# Altium PCB ft232h.PcbDoc (part 1 of 2)
Units mil, origin at the board's own origin, x right, y up, seen from the top; angles counter-clockwise.
Board outline 2559.06 x 1181.1 mil, 4 copper layers (Top Layer, L2, L3, Bottom Layer), stack 62.044 mil thick; 101 components, 60 nets, 328 pads, 69 vias.
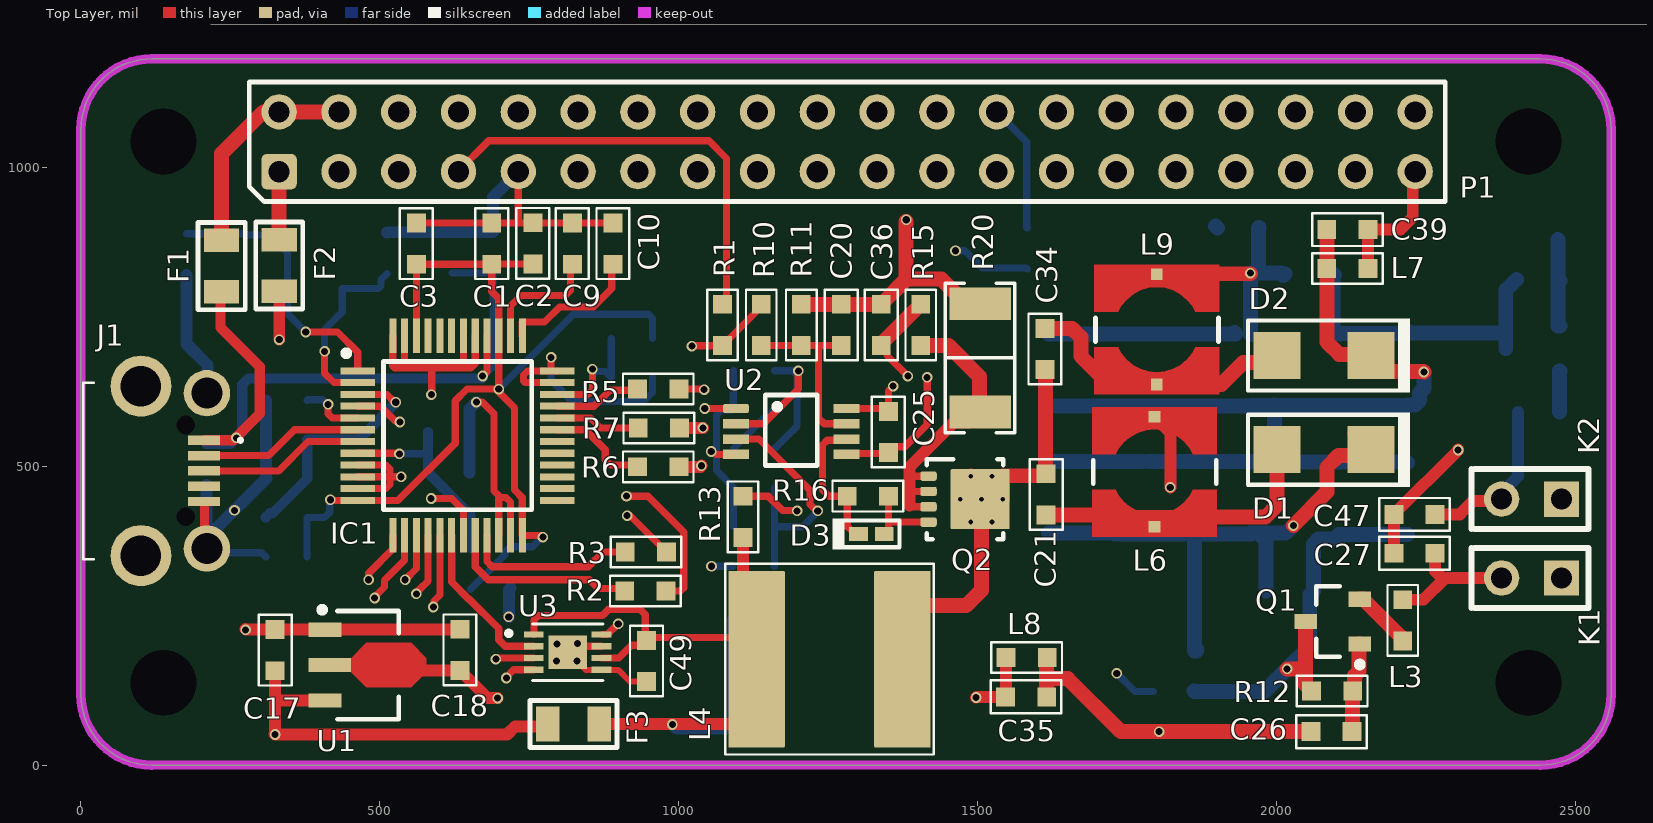
[diagram p0: Top Layer view]
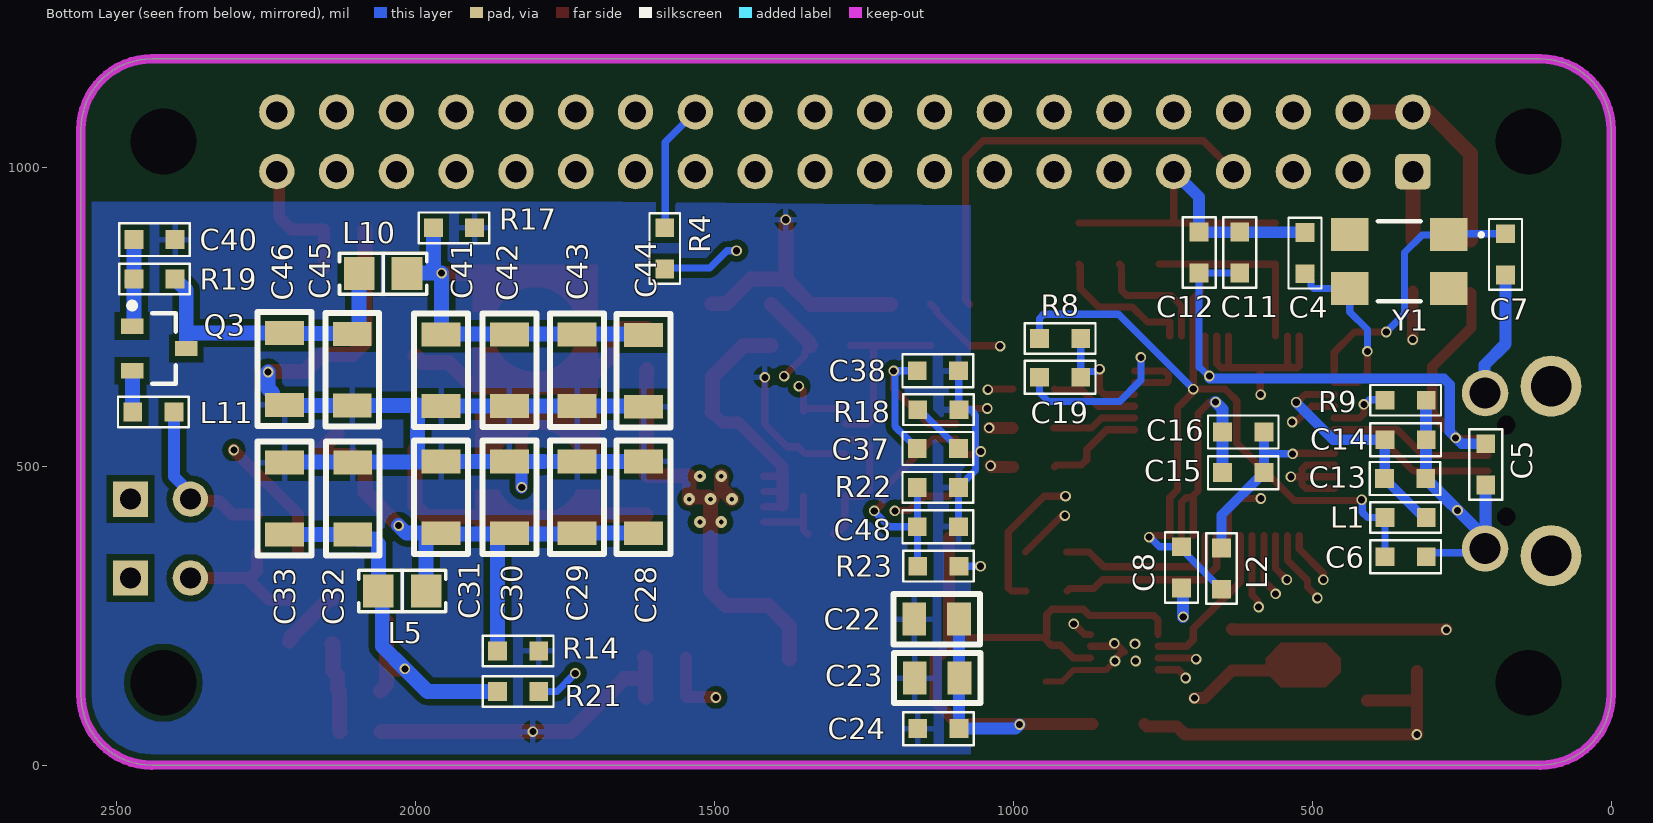
[diagram p1: Bottom Layer view, seen from below]
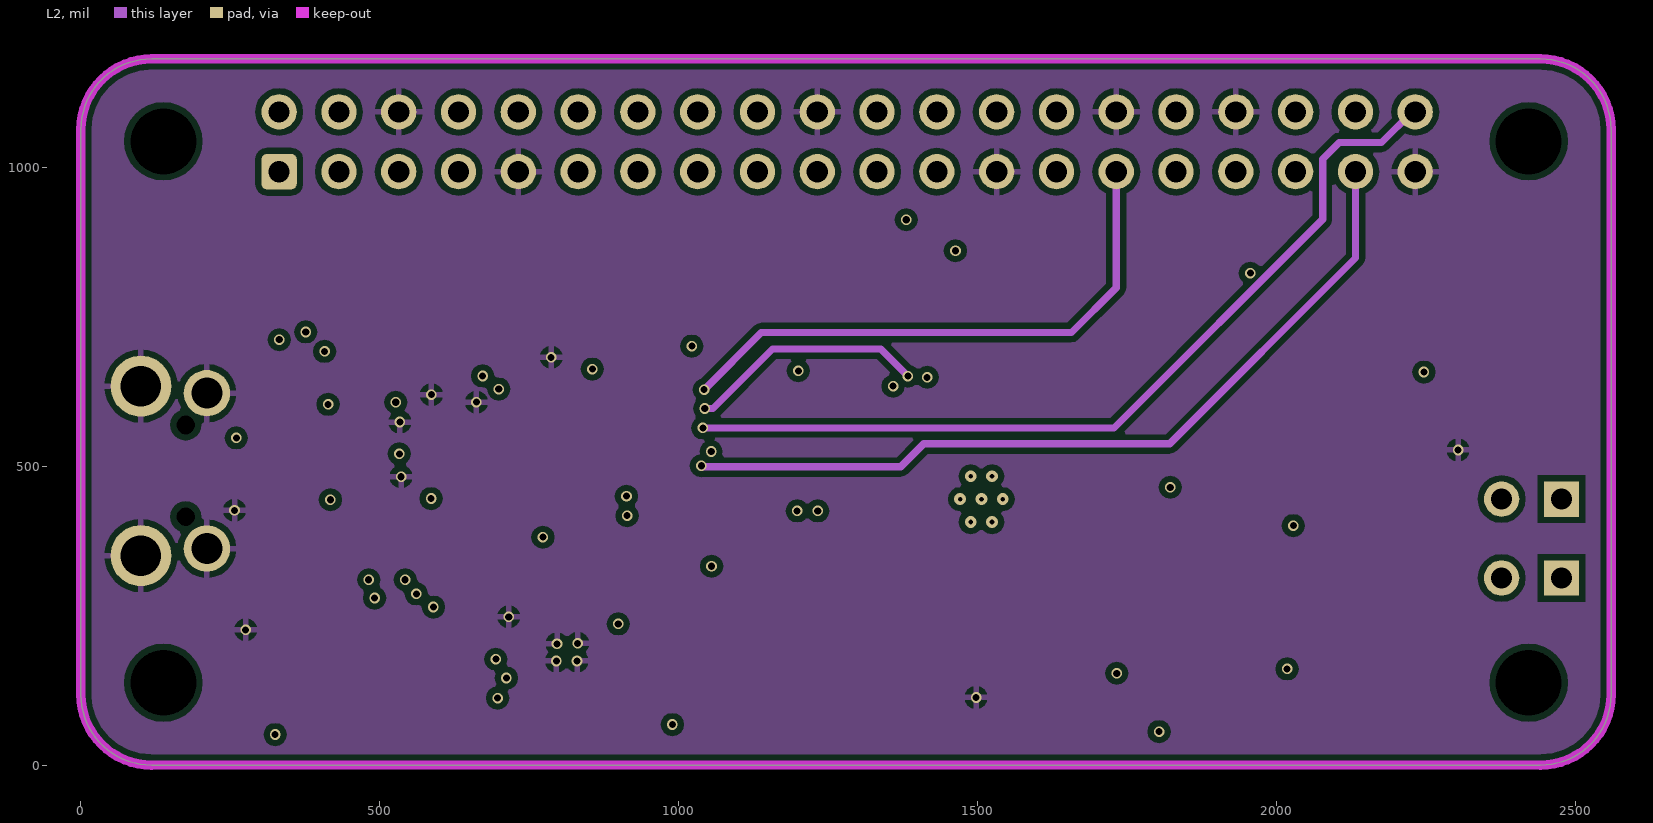
[diagram p2: L2]
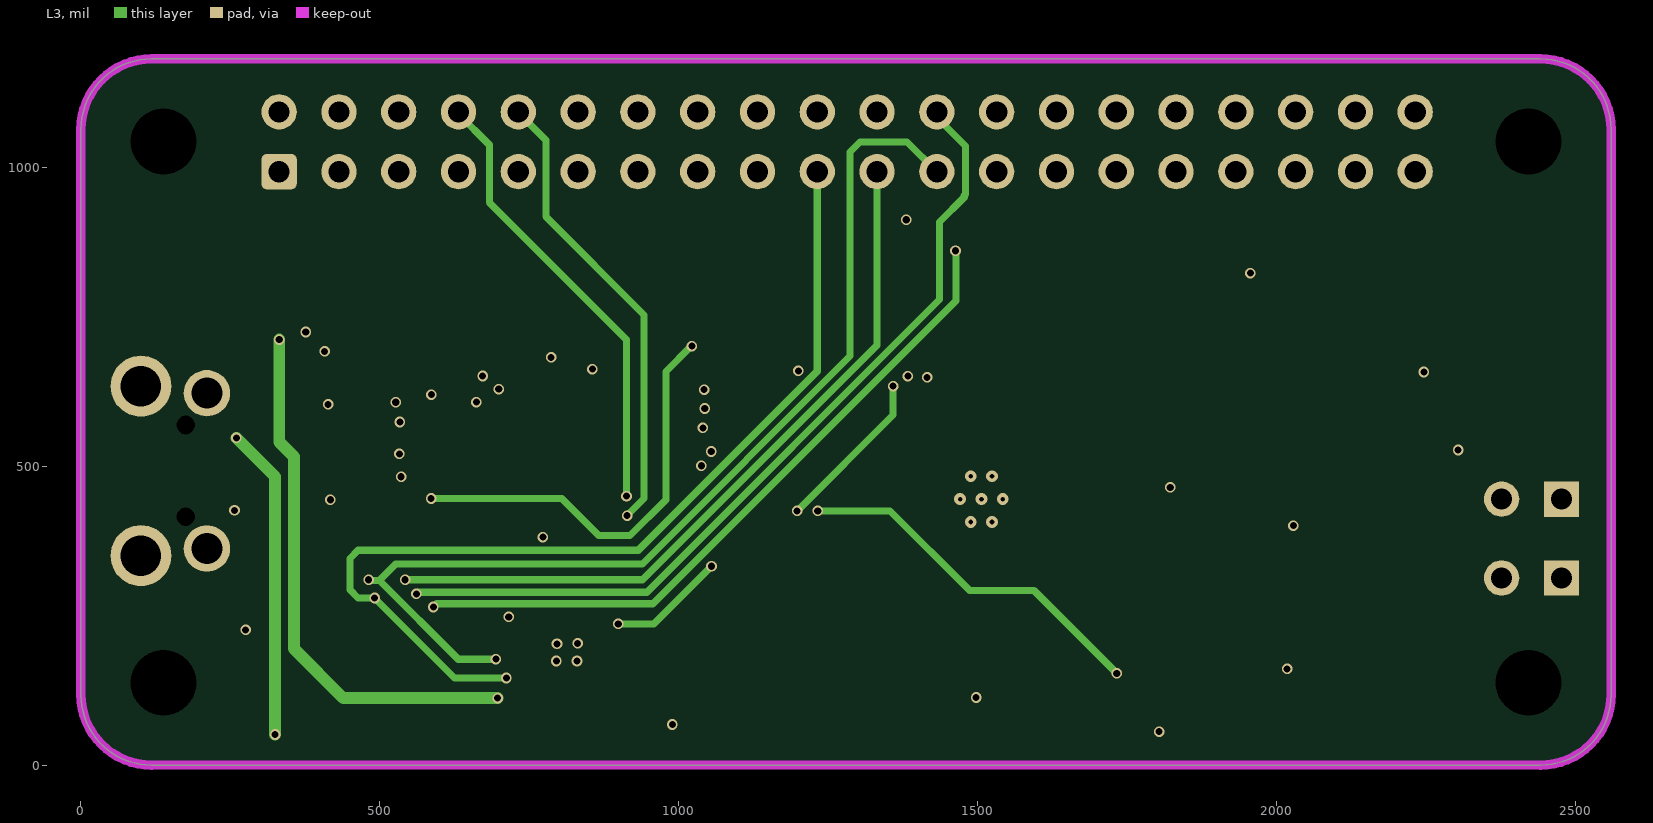
[diagram p3: L3]

## Layer stack, top to bottom
Top Solder: solder mask 0.4, Solder Resist, Dk 3.5
Top Layer: signal copper 1.4
Dielectric 2: prepreg 6, PP-018, Dk 4.3
L2: signal copper 1.378
Dielectric 1: dielectric 44.4882, FR-4, Dk 4.8
L3: signal copper 1.378
Dielectric 3: prepreg 6, PP-018, Dk 4.3
Bottom Layer: signal copper 1.4
Bottom Solder: solder mask 0.4, Solder Resist, Dk 3.5

## Board outline
0,118.11 0,1062.99 cw(c118.11,1062.99) 118.11,1181.1 2440.94,1181.1 cw(c2440.94,1062.99) 2559.06,1062.99 2559.06,118.11 cw(c2440.94,118.11) 2440.94,0 118.11,0 cw(c118.11,118.11)

## Design rules (kind name [scope] priority, off if disabled: settings)
Clearance Clearance_3 [InPolygon] p1: gap=10 ignorepadtopadclearanceinfootprint=FALSE except(0: Arc-Hole Track-Hole SMDPad-Hole THPad-Hole Via-Hole Fill-Hole Poly-Hole Region-Hole Text-Hole)
Clearance [All] p2: gap=7.09 ignorepadtopadclearanceinfootprint=TRUE except(0: Arc-Hole Track-Hole SMDPad-THPad SMDPad-Hole THPad-Hole Via-Hole Fill-Hole Poly-Hole Region-Hole Text-Hole)
ComponentClearance [All] p1: gap=3.94 collisioncheckmode=3 verticalgap=3.94 showdistances=FALSE
HoleSize [All] p1 off: absolutevalues=TRUE maxlimit=100 minlimit=1 maxpercent=80.000 minpercent=20.000
MinimumSolderMaskSliver [All] p1: minsoldermaskwidth=0
PasteMaskExpansion [All] p1: expansion=1.97
PolygonConnect PolygonConnect_1 [All] p1: connectstyle=Relief reliefconductorwidth=10 reliefentries=4 polygonreliefangle="90 Angle" airgapwidth=10
RoutingVias [All] p1: holewidth=13.78 width=21.65 viastyle="Through Hole" minholewidth=11.81 minwidth=17.72 maxholewidth=13.78 maxwidth=21.65
SilkToSilkClearance [All] p1: silktosilkclearance=0
SolderMaskExpansion [All] p1: expansion=4 istentingtop=FALSE
Width [All] p1: maxlimit=120 minlimit=7.09 preferedwidth=7.09
25 further rules are at their usual default settings.

## Components (designator, comment, footprint, x,y, rotation, side; value= is the part's Value field where it differs from the comment)
C1 "cap0603" "SM0603 _3D_cap" 687.01,872.05 r270 top value=2.2
C2 "cap0603" "SM0603 _3D_cap" 755.91,872.63 r270 top value=0.1
C3 "cap0603" "SM0603 _3D_cap" 561.02,872.05 r270 top value=0.1
C4 "cap0603" "SM0603 _3D_cap" 511.81,856.3 r270 bottom value=22
C5 "cap0603" "SM0603 _3D_cap" 209.65,502.95 r270 bottom value=0.1
C6 "cap0603" "SM0603 _3D_cap" 343.5,348.43 r0 bottom value=0.1
C7 "cap0603" "SM0603 _3D_cap" 176.53,854.33 r90 bottom value=22
C8 "cap0603" "SM0603 _3D_cap" 718.5,330.72 r90 bottom value=0.1
C9 "cap0603" "SM0603 _3D_cap" 821.85,872.05 r270 top value=0.1
C10 "cap0603" "SM0603 _3D_cap" 889.76,872.05 r270 top value=0.1
C11 "cap0603" "SM0603 _3D_cap" 621.06,857.28 r270 bottom value=0.1
C12 "cap0603" "SM0603 _3D_cap" 688.98,857.28 r270 bottom value=2.2
C13 "cap0603" "SM0603 _3D_cap" 344.49,479.33 r0 bottom value=0.1
C14 "cap0603" "SM0603 _3D_cap" 343.5,544.3 r0 bottom value=2.2
C15 "cap0603" "SM0603 _3D_cap" 615.16,489.17 r180 bottom value=0.1
C16 "cap0603" "SM0603 _3D_cap" 615.16,557.09 r180 bottom value=2.2
C17 "cap0603" "SM0603 _3D_cap" 324.8,192.19 r270 top value=2.2
C18 "cap0603" "SM0603 _3D_cap" 633.86,192.91 r270 top value=2.2
C19 "cap0603" "SM0603 _3D_cap" 921.26,648.61 r180 bottom value=10n
C20 "cap0603" "SM0603 _3D_cap" 1271.65,736.22 r90 top value=270pf
C21 "cap0603" "SM0603 _3D_cap" 1614.17,452.76 r270 top value=2u2
C22 "cap0805" SM0805 1165.35,244.09 r180 bottom value=47u
C23 "cap0805" SM0805 1164.57,145.67 r180 bottom value=47u
C24 "cap0603" "SM0603 _3D_cap" 1125,61.02 r180 bottom value=0.1
C25 "cap0603" "SM0603 _3D_cap" 1350.39,557.09 r90 top value=4u7
C26 "cap0603" "SM0603 _3D_cap" 2091.54,56.1 r0 top value="1u x100v"
C27 "cap0603" "SM0603 _3D_cap" 2230.31,354.33 r0 top value="0.1 x100v"
C28 "cap1206" SM1206 1618.11,507.87 r270 bottom value="2u2 x 100V"
C29 "cap1206" SM1206 1729.33,507.87 r270 bottom value="2u2 x 100V"
C30 "cap1206" SM1206 1842.52,507.87 r270 bottom value="2u2 x 100V"
C31 "cap1206" SM1206 1956.69,507.87 r270 bottom value="2u2 x 100V"
C32 "cap1206" SM1206 2104.33,505.91 r270 bottom value="2u2 x 100V"
C33 "cap1206" SM1206 2218.5,505.91 r270 bottom value="2u2 x 100V"
C34 "cap0603" "SM0603 _3D_cap" 1612.21,695.86 r90 top value=2u2
C35 "cap0603" "SM0603 _3D_cap" 1580.71,114.17 r180 top value=0.1
C36 "cap0603" "SM0603 _3D_cap" 1338.58,736.22 r90 top value=2n2
C37 "cap0603" "SM0603 _3D_cap" 1125.99,529.52 r180 bottom value=0.1
C38 "cap0603" "SM0603 _3D_cap" 1125.98,659.45 r180 bottom value=0.1
C39 "cap0603" "SM0603 _3D_cap" 2118.11,895.67 r0 top value=0.1
C40 "cap0603" "SM0603 _3D_cap" 2436.02,878.94 r180 bottom value="1u x100v"
C41 "cap1206" SM1206 1956.69,720.39 r270 bottom value="2u2 x 100V"
C42 "cap1206" SM1206 1842.52,720.39 r270 bottom value="2u2 x 100V"
C43 "cap1206" SM1206 1729.33,720.47 r270 bottom value="2u2 x 100V"
C44 "cap1206" SM1206 1618.11,719.41 r270 bottom value="2u2 x 100V"
C45 "cap1206" SM1206 2105.31,721.38 r270 bottom value="2u2 x 100V"
C46 "cap1206" SM1206 2218.5,722.44 r270 bottom value="2u2 x 100V"
C47 "cap0603" "SM0603 _3D_cap" 2230.32,419.29 r180 top value="0.1 x100v"
C48 "cap0603" "SM0603 _3D_cap" 1125.98,398.62 r180 bottom value=100
C49 "cap0603" "SM0603 _3D_cap" 945.87,174.21 r270 top value=0.1
D1 "STPS1150A" SMA 2078.74,527.56 r180 top value=150V
D2 "STPS1150A" SMA 2078.74,685.04 r180 top value=150V
D3 "1N4148X-TP" SOD-523 1321.85,386.81 r0 top value=75V
F1 "Fuse_0805" MF-PSMF050X-2 235.24,834.65 r90 top
F2 "Fuse_0805" MF-PSMF050X-2 331.69,835.63 r90 top
F3 "Fuse_0805" MF-PSMF050X-2 823.82,68.9 r0 top
IC1 "FT232HL-REEL" QFP50P900X900X160-48N 629.92,551.11 r0 top
J1 "KMMX-BSMT35S-B30TR" KMMXBSMT35SB30TR 100.39,492.13 r270 top
K1 "1x2PLS" JUMPER2 2475.98,312.99 r270 top
K2 "1x2PLS" JUMPER2 2475.98,444.88 r270 top
L1 "75R@100MHz" SM0603_3D_res 343.5,414.37 r180 bottom
L2 "75R@100MHz" SM0603_3D_res 651.57,328.74 r90 bottom
L3 "75R@100MHz" SM0603_3D_res 2210.63,242.13 r90 top
L4 "100uH" WE-LQS_8040 1251.97,177.17 r0 top
L5 "3.3uH" "WE 74479775233" 2021.65,291.34 r0 bottom
L6 "1mH" WE-TPC_4828 1795.28,490.16 r270 top
L7 "75R@100MHz" SM0603_3D_res 2118.11,830.71 r0 top
L8 "75R@100MHz" SM0603_3D_res 1581.69,180.12 r180 top
L9 "1mH" WE-TPC_4828 1799.21,728.35 r270 top
L10 "3.3uH" "WE 74479775233" 2053.78,821.85 r0 bottom
L11 "75R@100MHz" SM0603_3D_res 2437.99,590.55 r180 bottom
P1 "2x20 2.54mm vertical" PLD-40 1281.5,1042.52 r0 top
Q1 "FMMT495TA" SOT-23-3 2093.49,240.16 r180 top value="150 V"
Q2 "CSD19538Q3A" DNH0008A 1478.54,444.88 r0 top value=100V
Q3 "FMMT596TA" SOT-23-3 2428.15,696.84 r180 bottom value="200 V"
R1 "4k7" SM0603_3D_res 1072.82,736.22 r90 top
R2 "4k7" SM0603_3D_res 943.9,291.33 r180 top
R3 "4k7" SM0603_3D_res 944.88,356.3 r180 top
R4 "4k7" SM0603_3D_res 1582.68,864.18 r270 bottom
R5 "4k7" SM0603_3D_res 965.55,628.93 r0 top
R6 "4k7" SM0603_3D_res 965.55,499 r0 top
R7 "4k7" SM0603_3D_res 966.54,563.97 r180 top
R8 "4k7" SM0603_3D_res 921.26,713.58 r180 bottom
R9 "4k7" SM0603_3D_res 343.5,610.24 r180 bottom
R10 "4k7" SM0603_3D_res 1137.8,736.22 r270 top
R11 "4k7" SM0603_3D_res 1204.72,736.22 r270 top
R12 "4k7" SM0603_3D_res 2092.52,124.01 r0 top
R13 "4k7" SM0603_3D_res 1107.28,415.35 r270 top
R14 "4k7" SM0603_3D_res 1827.76,190.94 r0 bottom
R15 "4k7" SM0603_3D_res 1404.53,736.22 r270 top
R16 "0" SM0603_3D_res 1315.94,449.8 r0 top value=4k7
R17 "4k7" SM0603_3D_res 1935.04,898.62 r180 bottom
R18 "4k7" SM0603_3D_res 1125,594.48 r0 bottom
R19 "4k7" SM0603_3D_res 2436.02,812.99 r0 bottom
R20 "50mR" "RES 2010/5025" 1503.94,681.1 r270 top
R21 "4k7" SM0603_3D_res 1827.76,123.03 r180 bottom
R22 "4k7" SM0603_3D_res 1125.98,464.55 r0 bottom
R23 "4k7" SM0603_3D_res 1125,332.68 r0 bottom
U1 "ldo" SOT89-150P409X160-3N 479.33,167.32 r0 top
U2 "LM3478MMX/NOPB" MSOP8 1187.99,560.04 r270 top
U3 "MCP4811-E/MC" DFN-8 813.98,188.98 r0 top
Y1 "C5S-12.000-12-3030-X" C5S 354.33,842.52 r0 bottom

## Footprints (in the part's own frame and the unit in brackets; to place one, negate y for a bottom-side part, rotate by r counter-clockwise, add the part's x,y. Pads: shape width x height; smd on the part's side, far side on the other; paste and mask are expansions set on the pad)
C5S [mm]
  rect 1.6x1.4 smd: 1(-2.1,-1.15) 2(2.1,-1.15) 3(2.1,1.15) 4(-2.1,1.15)
  silkscreen extent -3.54,-1.7 0.9,1.7
DFN-8 [mm] "2x3mm DFN-8 Package"
  rect 0.84x0.27 smd: 1(-1.435,0.75) 2(-1.435,0.25) 3(-1.435,-0.25) 4(-1.435,-0.75) 5(1.435,-0.75) 6(1.435,-0.25) 7(1.435,0.25) 8(1.435,0.75)
  rect 1.625x1.425 smd paste-2: 9(0,0)
  silkscreen extent -2.6,-1.2 1.5,1.2, body extent -1.52,-1 1.52,1, height 0.87
DNH0008A [mm]
  rrect50% 0.7x0.4 smd paste-0.05 mask-0.05: 1(-1.55,0.975) 2(-1.55,0.325) 3(-1.55,-0.325) 4(-1.55,-0.975) 5(1.55,-0.975) 6(1.55,-0.325) 7(1.55,0.325) 8(1.55,0.975)
  rrect4% 2.51x2.55 smd paste-1.5 mask-1.5: 9(0.645,0)
  rrect50% 0.705x1.125 on Top Paste: 9A(-0.208,0.662) 9B(0.697,0.662) 9C(-0.208,-0.663) 9D(0.697,-0.663)
  silkscreen extent -1.62,-1.7 1.62,1.7, body extent -1.65,-1.66 1.65,1.66, height 0.91
JUMPER2 [mm]
  rect 1.5x1.5 hole 0.9: 1(0,0)
  round 1.5 hole 0.9: 2(0,-2.54)
  silkscreen extent -1.27,-3.81 1.27,1.14
KMMXBSMT35SB30TR [mm]
  rect 0.4x1.35 smd: 1(-1.3,2.675) 2(-0.65,2.675) 3(0,2.675) 4(0.65,2.675) 5(1.3,2.675)
  round 2.586 hole 1.724: MH1(-3.6,0) MH2(3.6,0)
  round 1.969 hole 1.312: MH3(-3.3,2.8) MH4(3.3,2.8)
  round 0.4 hole 0.8 unplated: MH5(-1.95,1.9) MH6(1.95,1.9)
  silkscreen extent -3.75,-2.45 3.75,4.28, body extent -4.36,-2.45 4.36,3.36, height 2.28
MF-PSMF050X-2 [mm]
  rect 1x1.5 smd: 1(-1.1,0) 2(1.1,0)
  silkscreen extent -1.85,-1 1.85,1, body extent -1.07,-0.67 1.08,0.68, height 1
MSOP8 [mm] "MSOP8  Pitch 0.65 mm"
  rrect50% 0.4x1.1 smd: 1(-0.925,-2.35)
  rect 0.4x1.1 smd: 2(-0.275,-2.35) 3(0.375,-2.35) 4(1.025,-2.35) 5(1.025,2.35) 6(0.375,2.35) 7(-0.275,2.35) 8(-0.925,2.35)
  silkscreen extent -1.5,-1.1 1.5,1.1
PLD-40 [mm]
  rrect30% 1.5x1.5 hole 0.9: 1(-24.13,-1.27)
  round 1.5 hole 0.9: 2(-24.13,1.27) 3(-21.59,-1.27) 4(-21.59,1.27) 5(-19.05,-1.27) 6(-19.05,1.27) 7(-16.51,-1.27) 8(-16.51,1.27) 9(-13.97,-1.27) 10(-13.97,1.27) 11(-11.43,-1.27) 12(-11.43,1.27) 13(-8.89,-1.27) 14(-8.89,1.27) 15(-6.35,-1.27) 16(-6.35,1.27) 17(-3.81,-1.27) 18(-3.81,1.27) 19(-1.27,-1.27) 20(-1.27,1.27) 21(1.27,-1.27) 22(1.27,1.27) 23(3.81,-1.27) 24(3.81,1.27) 25(6.35,-1.27) 26(6.35,1.27) 27(8.89,-1.27) 28(8.89,1.27) 29(11.43,-1.27) 30(11.43,1.27) 31(13.97,-1.27) 32(13.97,1.27) 33(16.51,-1.27) 34(16.51,1.27) 35(19.05,-1.27) 36(19.05,1.27) 37(21.59,-1.27) 38(21.59,1.27) 39(24.13,-1.27) 40(24.13,1.27)
  silkscreen extent -25.4,-2.54 25.4,2.54, body extent -25.4,-2.54 25.4,2.54, height 8.54
QFP50P900X900X160-48N [mm]
  rect 1.475x0.3 smd: 1(-4.238,2.75) 2(-4.238,2.25) 3(-4.238,1.75) 4(-4.238,1.25) 5(-4.238,0.75) 6(-4.238,0.25) 7(-4.238,-0.25) 8(-4.238,-0.75) 9(-4.238,-1.25) 10(-4.238,-1.75) 11(-4.238,-2.25) 12(-4.238,-2.75) 25(4.238,-2.75) 26(4.238,-2.25) 27(4.238,-1.75) 28(4.238,-1.25) 29(4.238,-0.75) 30(4.238,-0.25) 31(4.238,0.25) 32(4.238,0.75) 33(4.238,1.25) 34(4.238,1.75) 35(4.238,2.25) 36(4.238,2.75)
  rect 0.3x1.475 smd: 13(-2.75,-4.238) 14(-2.25,-4.238) 15(-1.75,-4.238) 16(-1.25,-4.238) 17(-0.75,-4.238) 18(-0.25,-4.238) 19(0.25,-4.238) 20(0.75,-4.238) 21(1.25,-4.238) 22(1.75,-4.238) 23(2.25,-4.238) 24(2.75,-4.238) 37(2.75,4.238) 38(2.25,4.238) 39(1.75,4.238) 40(1.25,4.238) 41(0.75,4.238) 42(0.25,4.238) 43(-0.25,4.238) 44(-0.75,4.238) 45(-1.25,4.238) 46(-1.75,4.238) 47(-2.25,4.238) 48(-2.75,4.238)
  silkscreen extent -4.85,-3.15 3.15,3.62, body extent -4.5,-4.5 4.5,4.5, height 1.6
"RES 2010/5025" [mm] "Chip Resistor, 2-Leads, Body 5,00x2,50mm, IPC Medium Density"
  rect 1.4x2.6 smd: 1(-2.3,0) 2(2.3,0)
  silkscreen extent -3.18,-1.48 3.18,1.48, body extent -2.5,-1.25 2.5,1.25, height 0.7
"SM0603 _3D_cap" [mm] "standard  0603 inch size"
  rect 0.8x0.8 smd: 1(-0.875,0) 2(0.875,0)
  silkscreen extent -1.5,-0.7 1.5,0.7, body extent -0.87,-0.47 0.88,0.48, height 0.87
SM0603_3D_res [mm] "0603 inch resistor"
  rect 0.8x0.8 smd: 1(-0.875,0) 2(0.875,0)
  silkscreen extent -1.5,-0.65 1.5,0.65, body extent -0.87,-0.47 0.88,0.48, height 0.55
SM0805 [mil]
  rect 40x55 smd: 1(0,0) 2(75,0)
  silkscreen extent -35,-42 110,42
SM1206 [mil]
  rect 40x65 smd: 1(0,0) 2(120,0)
  silkscreen extent -35,-45 155,45
SMA [mm]
  rect 2x2 smd: 1(-2,0) 2(2,0)
  silkscreen extent -3.66,-1.57 3.22,1.57, body extent -2.6,-1.3 2.6,1.3, height 2.42
SOD-523 [mm]
  rect 0.8x0.6 smd paste-0.05: 1(-0.55,0) 2(0.55,0)
  silkscreen extent -1.65,-0.66 1.2,0.66, body extent -0.8,-0.4 0.8,0.4, height 0.72
SOT89-150P409X160-3N [mm] "SOT89, 3-Leads, Body 4,50x2,45mm, Pitch 1,50mm, Lead Span 4,1mm, IPC Medium Density"
  rect 1.4x0.6 smd: 1(-1.8,1.5) 3(-1.8,-1.5)
  rect 1.8x0.6 smd: 2(-1.6,0)
  Top Layer region: -0.7,0.3 -0.05,0.95 1.85,0.95 2.5,0.3 2.5,-0.3 1.85,-0.95 -0.05,-0.95 -0.7,-0.3
  silkscreen extent -2.05,-2.3 1.32,2.47, body extent -1.28,-2.3 1.32,2.3, height 1.6
SOT-23-3 [mm] "SOT23, 3-Leads, Body 2.90x2.40mm, Pitch 0.95mm, IPC Medium Density"
  rect 0.95x0.65 smd: 1(-1.15,0.95) 2(-1.15,-0.95) 3(1.15,0)
  silkscreen extent -1.28,-1.5 0.7,1.95, body extent -1.41,-1.45 1.41,1.45, height 1.5
"WE 74479775233" [mm] "INDUCTOR 0805 HV"
  rect 1.3x1.4 smd: 1(-1.016,0) 2(1.016,0)
  silkscreen extent -1.85,-0.87 1.85,0.87, body extent -1,-0.64 1,0.64, height 1.26
WE-LQS_8040 [mm]
  rrect4% 2.4x7.5 smd: 1(-3.1,0) 2(3.1,0)
  silkscreen extent -4.43,-4.05 4.43,4.05, body extent -4,-4 4,4, height 4.2
WE-TPC_4828 [mm]
  rect 0.5x0.5 smd: 1(-2.35,0) 2(2.325,0)
  Top Layer region: 0.75,1.64 1.005,1.504 1.279,1.279 1.504,1.005 1.671,0.692 1.774,0.353 1.809,0 1.774,-0.353 1.671,-0.692 1.504,-1.005 1.279,-1.279 1.005,-1.504 0.75,-1.64 0.75,-2.65 2.75,-2.65 2.75,2.65 0.75,2.65
  Top Layer region: -0.75,1.64 -1.005,1.504 -1.279,1.279 -1.504,1.005 -1.671,0.692 -1.774,0.353 -1.809,0 -1.774,-0.353 -1.671,-0.692 -1.504,-1.005 -1.279,-1.279 -1.005,-1.504 -0.75,-1.64 -0.75,-2.65 -2.75,-2.65 -2.75,2.65 -0.75,2.65
  silkscreen extent -0.5,-2.6 0.5,2.63, body extent -2.4,-2.4 2.4,2.4, height 2.8

## Part data
C1 C2 C3 C4 C5 C6 C7 C8 C9 C10 C11 C12 C13 C14 C15 C16 C17 C18 C19 C20 C21 C24 C25 C26 C27 C34 C35 C36 C37 C38 C39 C40 C47 C48 C49: "Capacitor  0603 inch", LatestRevisionDate=17-Jul-2002, LatestRevisionNote="Re-released for DXP Platform.", PackageDescription="Radial Cap, Thru-Hole; 2 Leads; 0.3 in Pin Spacing", PackageReference=RAD-0.3, Published=8-Jun-2000, Publisher="Altium Limited"
C22 C23 C28 C29 C30 C31 C32 C33 C41 C42 C43 C44 C45 C46: "Capacitor", LatestRevisionDate=17-Jul-2002, LatestRevisionNote="Re-released for DXP Platform.", PackageDescription="Radial Cap, Thru-Hole; 2 Leads; 0.3 in Pin Spacing", PackageReference=RAD-0.3, Published=8-Jun-2000, Publisher="Altium Limited"
D1 D2: "DIODE SCHOTTKY 150V 1A SMA", Manufacturer=STMicroelectronics, Supplier Part Number 1=497-7545-1-ND, Value1=1A, Value2=0.78V, AEC Category=Q101, AEC Qualified=N, ComponentLink1Description="Datasheet link", ComponentLink1URL=http://www.st.com/web/en/resource/technical/document/datasheet/CD00003321.pdf, CompType=Diode, Green_EU RoHS=Incomplete, Green_EU RoHS-2=Incomplete, Green_Lifecycle="Not Set", Green_REACh=Incomplete, Io_A=1, LatestRevisionDate=2017-06-26, MountType=SMT, PackageReference=SMA, PartNumber=STPS1150A, Published=2008-06-26, Publisher="Texas Instruments", RJC_CperW=30, RoHS=Y, SizeArea_mm2=16.3228, SizeAreaWB_mm2=37.3428, SizeX_mm=5.59, SizeY_mm=2.92, SizeZ_mm=2.87, Supplier 1=Digi-Key, Supplier 2=Newark, Supplier 3=Mouser, Supplier Part Number 2=57P1608, Supplier Part Number 3=511-STPS1150A, SymbolVersion=2008-12-08, TJmax_C=175, Type=Schottky, U/M=EA, Vf_V=0.78, Vr_V=150
D3: "DIODE SWITCHING 75V 0.3A SOD-523", Manufacturer="Micro Commercial Components", Supplier Part Number 1=1N4148XTPMSCT-ND, Value1=0.3A, Value2=1.25V, AEC Category=Q101, AEC Qualified=?, ComponentLink1Description="Datasheet link", ComponentLink1URL=http://www.mccsemi.com/up_pdf/1N4148X(SOD-523).PDF, CompType=Diode, Green_EU RoHS=Incomplete, Green_EU RoHS-2=Incomplete, Green_Lifecycle="Not Set", Green_REACh=Incomplete, Io_A=0.3, LatestRevisionDate=2017-06-26, MountType=SMT, PackageReference=SOD-523, PartNumber=1N4148X-TP, Published=2008-06-26, Publisher="Texas Instruments", RoHS=Y, SizeArea_mm2=1.53, SizeAreaWB_mm2=5.13, SizeX_mm=1.7, SizeY_mm=0.9, SizeZ_mm=0.65, Supplier 1=Digi-Key, Supplier 2=Newark, Supplier 3=Mouser, Supplier Part Number 2=69R6666, Supplier Part Number 3=833-1N4148X-TP, SymbolVersion=2008-12-08, TJmax_C=150, Type=Switching, U/M=EA, Vf_V=1.25, Vr_V=75
F1 F2 F3: "FUSE 0805 RESETTABLE PTC 6V 500MA", Carrying Current Max=40, Current Temperature=20, Holding Current=500, Holding Current Max Ih=0.5, Initial Resistance Max=0.9, Initial Resistance Min=0.15, Manufacturer=BOURNS, Manufacturer Part Number=MF-PSMF050X-2, Operating Temperature Max=85, Operating Temperature Min=-40, Operating Voltage=6, PTC Fuse Case Style="0805 [2012 Metric]", Tripping Current=1, Automotive Qualification Standard=-, ComponentLink1Description=http://www.bourns.com/engineering/mfpsmf/mf-psmf050x.stp, ComponentLink1URL=http://www.bourns.com/engineering/mfpsmf/mf-psmf050x.stp, ComponentLink2Description=http://www.youtube.com/embed/MCSq9aHzU7o, ComponentLink2URL=http://www.youtube.com/embed/MCSq9aHzU7o, ComponentLink3Description=http://www.farnell.com/datasheets/2041417.pdf, ComponentLink3URL=http://www.farnell.com/datasheets/2041417.pdf, Current Max=40, External Depth=1.35, External Length / Height=0.65, External Width=2.15, Packaging="Cut Tape", Pricing 1="5=0.229, 50=0.205, 250=0.173, 500=0.137, 1500=0.136, 3000=0.134, 15000=0.133 (GBP)", Product Range="MF-PSMF Series", Resistance @ Temperature=0.15, Resistance Temperature=20, RoHS=YES, Stock 1=28, Supplier 1=Farnell, SVHC="No SVHC (20-Jun-2016)", Termination Type="Surface Mount Device", Thermistor Mounting=SMD, Thermistor Type="PTC Resettable Fuse", Trip Time=0.1, Voltage Rating=6
IC1: "Integrated Circuit", Manufacturer_Name="FTDI Chip", Mouser Part Number=895-FT232HL-REEL, Arrow Part Number=FT232HL-REEL, Arrow Price/Stock=https://www.arrow.com/en/products/ft232hl-reel/ftdi-chip, Datasheet Link=http://www.ftdichip.com/Support/Documents/DataSheets/ICs/DS_FT232H.pdf, Height=1.6mm, Manufacturer_Part_Number=FT232HL-REEL, Mouser Price/Stock=https://www.mouser.co.uk/ProductDetail/FTDI/FT232HL-REEL/?qs=rzPzygjq8vIanTFlYsBQCw%3D%3D
J1: "Connector", Manufacturer_Name=Kycon, Datasheet Link=http://www.kycon.com/Pub_Eng_Draw/KMMX-BSMT35S-BTR.pdf, Height=2.18mm, Manufacturer_Part_Number=KMMX-BSMT35S-B30TR
L1 L2 L3 L7 L8 L11: "chip inductance 0603", Case=0805, Manufacturer=MURATA, Manufacturer Part Number=BLM21BB750SN1D, Part Number=IND0805_MURATA_BLM21BB750SN1D, Power=700mA, Resistance=0.16R, Tolerance=±25%, Author="S. Jafar", Component Type=Standard, ComponentHeight=1.05mm, CreateDate=12/21/2015, LatestRevisionDate=12/21/2015, Mounted=Yes, Part Description="SMD EMIFIL Suppression Chip Ferrite Bead", Pin Count=2, SMD=Yes, Socket=No, Status=None, Table="Inductors SMD"
L4: library part inductance_8040, "INDUCTOR 100uH 8040 1A 290mOhm", Case/Package=Nonstandard, Current Rating=1.2A, DC Resistance (DCR)=290mR, Inductance Tolerance=20%, Manufacturer="Wurth Electronics", Manufacturer Part Number=74404084101, Max DC Current=1A, Max Operating Temperature=125°C, Min Operating Temperature=-40°C, Package Quantity=1000, Resistor Type=Wirewound, Saturation Current=1.5A, Self Resonant Frequency=6.4MHz, Test Frequency=100kHz, ComponentLink1Description=http://www.farnell.com/datasheets/1832943.pdf?src-supplier=Element14, ComponentLink1URL=http://www.farnell.com/datasheets/1832943.pdf?src-supplier=Element14, Core Material=Ferrite, Height=4.2mm, Height - Seated (Max)=0.165inch, Inductance=100uH, Length=0.315inch, Mount="Surface Mount", Packaging="Tape and Reel", Pricing 1="10=1.38, 50=0.922, 100=0.891, 250=0.859, 500=0.746, 1000=0.633, 5000=0.62 (EUR)", REACH SVHC=Unknown, RMS Current (Irms)=1A, RoHS Compliant=Yes, Shielding=Shielded, Stock 1=0, Supplier 1=Farnell, Termination=SMD/SMT, Tolerance=20%, Width=0.315inch
L5 L10: library part Inductor_0805, "INDUCTOR 3.3uH 0805 ±20%  1A", Case Code (Imperial)=0805, Case Code (Metric)=2012, Case/Package=SMD/SMT, Current Rating=1A, DC Resistance (DCR)=200mR, Manufacturer="Wurth Electronics", Manufacturer Part Number=74479775233, Max Operating Temperature=125°C, Min Operating Temperature=-40°C, Saturation Current=280mA, Self Resonant Frequency=30MHz, Test Frequency=1MHz, Tolerance=20%, Height - Seated (Max)=0.039inch, Inductance=3.3uH, Length=0.079inch, Mount="Surface Mount", Packaging="Tape and Reel", Pricing 1="10=0.739, 50=0.517, 250=0.446, 500=0.41, 1500=0.404, 3000=0.398, 15000=0.39 (EUR)", RoHS Compliant=Yes, Shielding=Unshielded, Stock 1=0, Supplier 1=Farnell, Width=0.047inch
L6 L9: library part inductor_4828, "INDUCTOR 1mH ±30% 140mA", Manufacturer="Wurth Electronics", Manufacturer Part Number=744043102, Inductance=1mH, Pricing 1="500=0.747 (EUR)", RoHS Compliant=Yes, Stock 1=0, Supplier 1=RSComponents
P1: "Header, 40-Pin", LatestRevisionDate=17-Jul-2002, LatestRevisionNote="Re-released for DXP Platform.", Publisher="Altium Limited"
Q1: "TRANSISTOR NPN 150V 1A AEC-Q101 SOT-23", Manufacturer="Diodes Inc.", Supplier Part Number 1=FMMT495CT-ND, Value1="1 A", Value2=300.0, AEC Category=Q101, AEC Qualified=Y, ComponentLink1Description="Datasheet link", ComponentLink1URL=https://www.diodes.com/assets/Datasheets/FMMT495.pdf, CompType=BJT, HfeMax=300.0, IcRated_A=1A, LatestRevisionDate=2017-06-26, MountType=SMT, NPN=1.0, PackageReference=SOT-23, PartNumber=FMMT495TA, PNP=0.0, Published=2008-07-31, Publisher="Texas Instruments", RoHS=Y, SizeArea_mm2=7.5, SizeAreaWB_mm2=14.0, SizeX_mm=2.5, SizeY_mm=3.0, SizeZ_mm=1.1, Supplier 1=Digi-Key, Supplier 2=Mouser, Supplier Part Number 2=522-FMMT495TA, TaMax_C=150°C, TaMin_C=-55°C, U/M=EA, Vceo_V=150V, Vcesat1_V=3dV
Q2: "MOSFET N 100V 5A", Alternate Manufacturer=None, Manufacturer="Texas Instruments", Value2="7.2 nC", AEC Category=Q101, AEC Qualified=N, ChMode=Enhancement, ChType=N, ComponentLink1Description="Datasheet link", ComponentLink1URL=http://www.ti.com/lit/ds/symlink/csd19538q3a.pdf, CompType=MOSFET, IdsMax_A=5A, MountType=SMT, PackageReference=DNH0008A, PartNumber=CSD19538Q3A, QgTyp_nC=7.2, RoHS=Y, SizeArea_mm2=10.89, SizeAreaWB_mm2=18.49, SizeX_mm=3.3, SizeY_mm=3.3, SizeZ_mm=0.9, VdsMax_V=100V, Vgs_V=20V
Q3: "TRANSISTOR PNP 200V 0.3A SOT-23", Manufacturer="Diodes Inc.", Supplier Part Number 1=FMMT596CT-ND, Value1="0.3 A", Value2=300, AEC Category=Q101, AEC Qualified=N, ComponentLink1Description="Datasheet link", ComponentLink1URL=http://www.diodes.com/_files/datasheets/FMMT596.pdf, CompType=BJT, HfeMax=300, IcRated_A=3dA, LatestRevisionDate=2017-03-09, MountType=SMT, NPN=0, PackageReference=SOT-23, PartNumber=FMMT596TA, PNP=1, Published=2008-07-31, Publisher="Texas Instruments", RoHS=Y, SizeArea_mm2=7.5, SizeAreaWB_mm2=14, SizeX_mm=2.5, SizeY_mm=3, SizeZ_mm=1.1, Supplier 1=Digi-Key, Supplier 2=Mouser, Supplier Part Number 2=522-FMMT596TA, TaMax_C=150°C, TaMin_C=-55°C, U/M=EA, Vceo_V=200V, Vcesat1_V=2dV
R1 R2 R3 R4 R5 R6 R7 R8 R9 R10 R11 R12 R13 R14 R15 R16 R17 R18 R19 R21 R22 R23: "Res_0603_EU", Case=1206, Manufacturer=GENERIC, Manufacturer1 ComponentHeight=0.65mm, Manufacturer1 Example="NIC COMPONENT", Manufacturer1 Part Number=NRC12F4701TRF, Manufacturer Part Number=R1206_4K7_1%_0.25W_100PPM, Power=0.25W, Tolerance=±1%, Author="CERN DEM JLC", Component Type=Standard, CreateDate=12/3/2007, HelpURL=\\cern.ch\dfs\Applications\Altium\Datasheets\R1206_NIC_NRC.pdf, LatestRevisionDate=3/13/2008, Mounted=Yes, Part Description="General Purpose Thick Film Chip Resistor", Part Number=R1206_4K7_1%_0.25W_100PPM, Pin Count=2, SMD=Yes, Socket=No, Status=Preferred, Table="Resistors SMD", TC=±100ppm/°C
R20: library part Res_SMT_2010, "RESISTOR 0.05R 2010 1%", Case Code (Imperial)=2010, Case Code (Metric)=5025, Manufacturer=Panasonic, Manufacturer Part Number=ERJ-L1DKF50MU, Max Operating Temperature=125°C, Max Power Dissipation=500mW, Min Operating Temperature=-55°C, Package Quantity=1, Resistance Tolerance=1%, Resistor Type="Thick Film", Temperature Coefficient=100ppm/°C, Case/Package=2010, ComponentLink1Description=http://www.farnell.com/datasheets/1790602.pdf?src-supplier=Element14, ComponentLink1URL=http://www.farnell.com/datasheets/1790602.pdf?src-supplier=Element14, ComponentLink2Description=https://industrial.panasonic.com/cdbs/www-data/pdf/RDN0000/AOA0000C313.pdf?src-supplier=Digi-Key, ComponentLink2URL=https://industrial.panasonic.com/cdbs/www-data/pdf/RDN0000/AOA0000C313.pdf?src-supplier=Digi-Key, ComponentLink3Description=http://industrial.panasonic.com/lecs/www-data/pdf/AOA0000/AOA0000CE3.pdf?src-supplier=Digi-Key, ComponentLink3URL=http://industrial.panasonic.com/lecs/www-data/pdf/AOA0000/AOA0000CE3.pdf?src-supplier=Digi-Key, Construction=Rectangular, Contact Plating=Tin, Depth=2.5mm, Features="Automotive AEC-Q200", Height=0.028inch, Lead Free="Lead Free", Length=5mm, Military Standard=Not, Mount="Surface Mount", Number of Terminations=2, Packaging="Tape and Reel", Power Rating=500mW, Radiation Hardening=No, REACH SVHC="No SVHC", Resistance=50mR, RoHS Compliant=Yes, Series=ERJ, Stock 1=0, Supplier 1=Farnell, Technology="THICK FILM", Termination=SMD/SMT, Tolerance=1%, Width=2.5mm
U1: library part LM1117-XX-SOT89-3, "SOT89-3 ldo"
U2: "DC/DC Controller 2.97V to 40V Input", Case/Package=MSOP, Manufacturer="TI National Semiconductor", Max Frequency=1MHz, Max Operating Temperature=125°C, Min Operating Temperature=-40°C, Operating Supply Voltage=40V, Output Current=1A, Output Voltage=1.26V, Quiescent Current=2.7mA, ComponentLink1Description=http://www.ti.com/lit/ds/symlink/lm3478.pdf?src-supplier=Digi-Key, ComponentLink1URL=http://www.ti.com/lit/ds/symlink/lm3478.pdf?src-supplier=Digi-Key, Contact Plating=Tin,Matte, Duty Cycle=100%, Lead Free="Lead Free", Manufacturer Part Number=LM3478MMX/NOPB, Max Duty Cycle=100%, Mount="Surface Mount", Number of Outputs=1, Number of Pins=8, Packaging="Tape and Reel", Radiation Hardening=No, Stock 1=0, Supplier 1=Farnell, Switching Frequency=1MHz
U3: "DAC 1-CH 10-bit DFN-8", Case/Package=DFN, Input Offset Voltage (Vos)=820uV, Manufacturer=Microchip, Max Operating Temperature=125°C, Max Supply Voltage=5.5V, Min Operating Temperature=-40°C, Min Supply Voltage=2.7V, Nominal Supply Current=330uA, Operating Supply Voltage=5V, Package Quantity=150, ComponentLink1Description=http://www.farnell.com/datasheets/630375.pdf?src-supplier=Element14, ComponentLink1URL=http://www.farnell.com/datasheets/630375.pdf?src-supplier=Element14, ComponentLink2Description=http://uk.rs-online.com/webdocs/1381/0900766b813810b8.pdf?src-supplier=RSComponents, ComponentLink2URL=http://uk.rs-online.com/webdocs/1381/0900766b813810b8.pdf?src-supplier=RSComponents, ComponentLink3Description=http://ww1.microchip.com/downloads/en/DeviceDoc/22244B.pdf?src-supplier=Avnet, ComponentLink3URL=http://ww1.microchip.com/downloads/en/DeviceDoc/22244B.pdf?src-supplier=Avnet, ComponentLink4Description=http://www.microchip.com/mymicrochip/filehandler.aspx?ddocname=en547908&src-supplier=Future+Electronics, ComponentLink4URL=http://www.microchip.com/mymicrochip/filehandler.aspx?ddocname=en547908&src-supplier=Future+Electronics, ComponentLink5Description=https://www.verical.com/server-webapp/html/getDatasheet?partID=765518&src-supplier=Verical, ComponentLink5URL=https://www.verical.com/server-webapp/html/getDatasheet?partID=765518&src-supplier=Verical, ComponentLink6Description=http://ww1.microchip.com/downloads/en/DeviceDoc/22244B.pdf?src-supplier=Avnet+Europe, ComponentLink6URL=http://ww1.microchip.com/downloads/en/DeviceDoc/22244B.pdf?src-supplier=Avnet+Europe, ComponentLink7Description=http://www.microchip.com/mymicrochip/filehandler.aspx?ddocname=en023833&src-supplier=Digi-Key, ComponentLink7URL=http://www.microchip.com/mymicrochip/filehandler.aspx?ddocname=en023833&src-supplier=Digi-Key, ComponentLink8Description=http://www.produktinfo.conrad.com/datenblaetter/1000000-1099999/001083268-da-01-en-DAC_10B_SPI_VREF_MCP4811_E_MC_DFN_8_MCP.pdf?src-supplier=Conrad, ComponentLink8URL=http://www.produktinfo.conrad.com/datenblaetter/1000000-1099999/001083268-da-01-en-DAC_10B_SPI_VREF_MCP4811_E_MC_DFN_8_MCP.pdf?src-supplier=Conrad, Full Scale Error=3.5LSB, Height=0.95mm, Integral Nonlinearity (INL)=3.5LSB, Interface=SPI,Serial,3-WIRE, Lead Free="Lead Free", Length=2mm, Manufacturer Part Number=MCP4811-E/MC, Mount="Surface Mount", Number of Bits=10, Number of Channels=1, Number of Converters=1, Number of DAC Channels=1, Number of Pins=8, Output Polarity=Bipolar, Output Type=Voltage, Packaging=Rail/Tube, Polarity=Bipolar, Radiation Hardening=No, REACH SVHC="No SVHC", Resolution=10b, Settling Time=4.5us, Stock 1=0, Supplier 1=Farnell, Supply Current=330uA, Width=3mm
Y1: "Crystal or Oscillator", Manufacturer_Name=AKER, Datasheet Link=https://docs-emea.rs-online.com/webdocs/1233/0900766b812338b8.pdf, Manufacturer_Part_Number=C5S-12.000-12-3030-X

## Free pads (board coordinates)
  round 0 hole 110.24 unplated mask+70.87: 0(137.8,137.8) 0(137.8,1043.31) 0(2421.26,137.8) 0(2421.26,1043.31)

## Via types
v1: diameter 17.72, hole 11.81, Top Layer to Bottom Layer, 62 vias
v2: diameter 19.68, hole 7.87, Top Layer to Bottom Layer, 7 vias

## Nets (pads, with @x,y where several pads share a name; then routed paths per layer and width w, separated by ;. In a path a pad name is that pad's centre, name@x,y a point inside that pad or via, vN(x,y) a via of type N, cw(c..) or ccw(c..) an arc to the next point about the centre after c; other vN are vias at no path point)
+3.3VE: F2.2 P1.1 | length 113.7
  Top Layer w25: P1.1 331.59,992.42 331.59,879.04 F2.2
+3.3VI: C1.2 C2.2 C3.2 C6.2 C8.2 IC1.12 IC1.24 IC1.39 IC1.46 L1.1 L2.1 R8.1 | length 1859.5
  Top Layer w12: v1@416.34,442.91 416.41,442.84 IC1.12 530.44,442.84 625.98,538.39 625.98,609.25 645.67,628.94 v1(698.82,628.94) ; IC1.46 C3.2 C1.2 ; C2.2 755.62,837.89 687.3,837.89 C1.2 ; v1(772.64,381.2) 771.09,381.2 768.03,384.26 IC1.24 738.19,447.27 725.39,460.06 725.39,597.44 698.82,624.02 v1(698.82,628.94) ; C1.2 687.01,792.32 698.82,780.51 IC1.39 v1(698.82,628.94)
  Bottom Layer w12: C6.2 L1.1 407.48,414.37 416.23,423.12 416.23,442.8 v1(417.32,443.9) ; L2.1 708.76,351.48 708.76,355.42 C8.2 755.06,365.17 771.09,381.2 v1(772.64,381.2) ; v1(698.82,628.94) 823.82,753.94 948.68,753.94 955.71,746.91 R8.1
+5V: C5.1 C11.2 C12.2 C17.2 F1.1 F3.1 IC1.40 J1.1 U1.3 | length 2393.6
  Top Layer w12: v1(671.78,650.88) 672.1,650.88 679.13,657.91 IC1.40
  Top Layer w17: J1.1 254.92,543.31 299.21,587.6 299.21,666.34 233.27,732.28 233.27,789.37 F1.1
  Top Layer w20: v1@323.82,52.17 324.8,53.15 324.8,105.45 ; v1(324.8,51.18) 712.6,51.18 726.38,64.96 776.57,64.96 F3.1 ; C17.2 324.8,105.45 ; U1.3 327.62,108.27 324.8,105.45
  L3 w20: v1(259.84,547.24) 324.8,482.28 v1(324.8,51.18)
  Bottom Layer w12: C11.2 C12.2 688.97,665.2 687.64,665.2 673.33,650.88 v1(671.78,650.88)
  Bottom Layer w17: C5.1 249.8,537.4 259.65,547.24 v1(259.84,547.24) 259.84,547.44 269.68,557.28 269.68,636.7 279.64,646.65 475.52,646.65 475.71,646.46 v1@671.78,646.46
+5VE: F1.2 P1.2 P1.4 | length 369.9
  Top Layer w25: F1.2 235.24,1022.64 305.12,1092.52 P1.2 P1.4
+5VP: C22.2 C23.2 C24.2 C49.1 F3.2 L4.1 R13.2 U3.1 U3.6 | length 1369.6
  Top Layer w12: U3.1 757.48,242.72 764.76,250 872.05,250 882.87,260.83 935.04,260.83 943.9,251.97 943.9,215.55 C49.1@945.87,213.58 ; U3.6 899.61,179.13 921.02,200.55 936.12,200.55 945.87,210.3 C49.1@945.87,213.58 ; L4.1@1107.29,199.8 1093.51,213.58 C49.1@945.87,213.58
  Top Layer w20: F3.2 1092.68,68.9 1129.92,106.14 L4.1 1107.29,199.8 R13.2
  Bottom Layer w12: C22.2 1090.45,244 C22.2@1090.55,243.9
  Bottom Layer w20: v1(989.17,67.91) 996.06,61.03 C24.2 1090.45,61.12 C22.2@1090.45,244
CCA: C10.2 IC1.37 | length 237.1
  Top Layer w12: IC1.37 738.19,740.9 738.28,740.99 775.44,740.99 800.8,766.35 856.9,766.35 887.8,797.24 887.8,835.63 C10.2
CORE: C9.2 IC1.38 | length 205.7
  Top Layer w12: IC1.38 718.5,767.72 736.22,785.43 810.04,785.43 818.9,794.29 818.9,834.64 C9.2
CS0: IC1.16 P1.24 | length 1527.6
  Top Layer w12: v1@565.94,293.31 580.71,308.07 IC1.16
  L3 w12: v1(561.02,286.42) 563.67,289.06 946.54,289.06 1436.02,778.54 1436.02,908.46 1477.36,949.8 1477.36,952.76 1479.33,954.72 1479.33,1035.43 1431.5,1083.27 P1.24
CS1: IC1.17 R4.2 | length 1428.2
  Top Layer w12: v1(589.57,264.47) 590.66,265.57 590.66,274.72 600.39,284.45 IC1.17
  L3 w12: v1(589.57,264.47) 595.07,269.98 956.98,269.98 1463.58,776.57 1463.58,860.24 v1@1462.6,861.22
  Bottom Layer w12: v1(1462.6,860.24) 1478.35,860.24 1506.89,831.69 1580.71,831.69 R4.2
CS2: IC1.18 U3.2 | length 270.9
  Top Layer w12: IC1.18 620.08,306.1 648.62,277.56 649.61,277.56 698.82,228.35 698.82,209.65 709.65,198.82 U3.2
DI: IC1.15 P1.21 | length 1325.3
  Top Layer w12: v1@541.34,309.06 v1(542.32,310.04) 561.02,328.74 IC1.15
  L3 w12: v1(542.32,310.04) 939.39,310.04 1331.5,702.14 P1.21
DO: IC1.14 P1.19 U3.4 | length 1796.7
  Top Layer w12: v1(491.14,279.53) 491.14,281.07 507.87,297.81 507.87,309.06 541.34,342.52 IC1.14 ; v1@711.61,147.64 723.43,159.45 U3.4
  L3 w12: v1(711.61,145.67) 625,145.67 v1(491.14,279.53) 463.58,279.53 449.8,293.31 449.8,345.47 463.58,359.25 932.09,359.25 1231.5,658.66 P1.19
EA_CLK: IC1.33 R5.1 | length 146.2
  Top Layer w12: IC1.33 858.19,600.32 884.84,626.97 929.13,626.97 R5.1
fb: C32.2 C33.2 L5.2 Q1.3 R12.1 R21.1 | length 714.6
  Top Layer w25: v1(2017.23,160.93) 2047.72,160.93 2048.22,160.43 ; Q1.3 2048.22,160.43 ; R12.1 2048.22,133.86 2048.22,160.43
  Bottom Layer w25: R21.1@1861.22,124.02 R21.1 1979.33,123.03 v1(2017.23,160.93) 2055.12,198.82 2055.12,284.8 L5.2 2061.65,370.2 2069.86,378.41 2096.83,378.41 C32.2 C33.2
GND: C1.1 C2.1 C3.1 C4.1 C5.2 C6.1 C7.1 C8.1 C9.1 C10.1 C11.1 C12.1 C13.1 C14.1 C15.1 C16.1 C17.1 C18.1 C19.1 C27.1 C35.2 C39.2 C47.2 C49.2 IC1.4 IC1.9 IC1.10 IC1.11 IC1.22 IC1.23 IC1.35 IC1.36 IC1.41 IC1.42 IC1.47 IC1.48 J1.5 J1.MH1 J1.MH2 J1.MH3 J1.MH4 L7.2 L8.2 P1.6 P1.9 P1.20 P1.25 P1.30 P1.34 P1.39 R9.2 U1.1 U3.5 U3.7 U3.9 | length 4243.8
  Top Layer w10: v1(829.72,174.21) 844.49,159.45 U3.5 898.62,159.45 918.31,139.76 C49.2
  Top Layer w12: IC1.11 509.7,462.53 516.73,469.56 516.73,482.21 ; IC1.10 516.73,482.21 ; IC1.9 509.7,501.9 516.73,494.87 516.73,482.21 ; IC1.4 463.17,600.23 501.15,600.23 525.3,576.08 v1@532.77,576.08 ; IC1.48 521.65,667.32 524.37,664.61 534.31,664.61 ; v1@531.5,482.28 531.42,482.21 516.73,482.21 ; IC1.47 541.34,671.64 534.31,664.61 ; C3.1 C1.1 731.3,906.49 ; v1(586.12,619.59) 586.61,620.08 586.61,664.61 534.31,664.61 ; 587.04,664.61 639.76,664.61 ; IC1.42@639.86,691.27 639.86,717.86 IC1.42 639.76,666.82 641.97,664.61 652.42,664.61 659.45,671.64 IC1.41 ; v1(661.42,606.99) 661.51,607.09 671.45,607.09 690.94,587.6 690.94,458.66 700.79,448.82 700.79,447.83 ; IC1.22 698.82,445.87 700.79,447.83 ; IC1.23 718.5,439.96 710.63,447.83 700.79,447.83 ; P1.9 731.3,992.32 731.3,906.49 ; v1@786.42,684.06 786.42,659.47 IC1.36@786.51,659.38 ; IC1.35 743.18,639.69 740.16,642.72 740.16,652.35 747.19,659.38 IC1.36@786.51,659.38 ; IC1.36 IC1.36@786.51,659.38 ; U3.9@831.2,175.69 817.91,188.98 U3.9 823.82,198.82 U3.7 ; C10.1 C9.1 731.3,906.49
  Top Layer w15: J1.5 206.32,440.94 206.69,440.57 206.69,366.14 J1.MH4
  Top Layer w20: v1@275.59,227.36 276.31,226.64 C17.1 325.16,227 633.5,227 C18.1 ; v1(1497.05,113.19) 1498.03,114.17 C35.2@1545.27,114.17 ; C35.2 C35.2@1545.27,114.17 ; L8.2 1546.75,179.62 1546.75,115.65 C35.2@1545.27,114.17 ; L7.2 C39.2 2206.7,895.67 2227.36,916.34 2227.36,988.39 P1.39 ; C27.1 C47.2 2303.15,526.57 v1@2303.15,527.56
  Bottom Layer w12: J1.MH4 217.52,355.31 302.17,355.31 C6.1 ; v1(786.42,682.09) 786.42,643.7 821.85,608.27 940.94,608.27 955.71,623.03 C19.1
  Bottom Layer w20: C7.1 176.53,704.38 211.61,669.29 211.61,623.03 J1.MH3 ; C5.2 210.14,468.01 210.14,362.7 J1.MH4 221.64,373.21 221.64,390.93 C13.1 309.55,479.82 309.55,609.75 R9.2 ; C4.1 512.3,891.24 688.48,891.24 C12.1 688.97,950 P1.9 ; C15.1 C16.1 649.6,595.18 v1(661.42,606.99) ; v1(715.55,248.03) 715.55,293.32 C8.1
  other v1: 795.28,174.21 796.26,202.76 830.71,203.74 275.59,226.38 256.89,426.18 535.43,482.28 2303.15,527.07 533.46,573.82
HGND: C20.2 C22.1 C23.1 C24.1 C25.1 C26.1 C28.1 C29.1 C30.1 C31.1 C32.1 C33.1 C35.1 C36.2 C38.2 C39.1 C40.2 C41.2 C42.2 C43.2 C44.2 C45.2 C46.2 C48.2 D2.1 L6.1 L7.1 L8.1 R11.1 R14.1 R17.2 R18.1 R20.1 R22.1 U2.4 U2.5 | length 3556.2
  Top Layer w12: v1(1054.13,524.61) 1057.09,524.61 1062.01,519.68 U2.4 ; U2.5 1281.99,521.16 1348.91,521.16 C25.1 1360.14,532.39 1377.86,532.39 1415.35,569.88 v1(1415.35,648.62) v1@1415.35,651.26
  Top Layer w20: L6.1 1821.85,556.1 v1(1821.85,464.57)
  Top Layer w25: R11.1 C36.2 ; C36.2 1379.92,812.01 ; v1@1379.92,909.61 1379.92,812.01 ; R20.1 1480.32,771.65 1438.98,812.99 1380.9,812.99 1379.92,812.01 ; C35.1@1614.17,114.17 1615.16,115.15 1615.16,143.7 ; L8.1 1615.16,179.13 1615.16,143.7 ; C26.1 1739.17,56.11 1650.59,144.68 1616.14,144.68 1615.16,143.7 ; C39.1 L7.1 2083.66,707.68 2104.33,687.01 2155.51,687.01 D2.1 2184.35,658.17 2245.37,658.17 v1(2246.06,657.48)
  Bottom Layer w12: C48.2 R22.1 1062.7,493.38 1062.7,584.82 1065.25,587.37 1065.25,589.86 1069.88,594.49 1090.54,594.49 1091.04,594.97 1091.04,658.96 C38.2
  Bottom Layer w20: 1775.59,507.87 1785.28,507.87 ; v1(1821.85,464.57) 1821.85,501.97 C30.1@1827.76,507.87
  Bottom Layer w25: C28.1 C29.1 1775.59,507.87 ; C44.2@1618.11,598.43 1620.08,600.39 C41.2 ; 1785.28,507.87 1827.76,507.87 C30.1 C31.1 ; R17.2@1897.34,901.87 R17.2 ; C33.1 2217.52,506.89 1957.68,506.89 C31.1 ; v1(2246.06,657.48) 2246.06,630 2238.5,622.44 2238.5,609.94 2231,602.44 C46.2 2217.48,601.42 1996.06,601.42 ; C31.1 1996.06,507.87 1996.06,601.42 ; C41.2 1994.09,600.39 1995.12,601.42 ; C41.2 1957.71,601.42 1995.12,601.42 ; 1995.12,601.42 1996.06,602.36 1996.06,601.42 ; 1995.12,601.42 1996.06,601.42
  other v1: 1803.15,56.1 1380.33,912.11
HV+: C27.2 K1.2 L3.2 | length 231.6
  Top Layer w20: L3.2 2245.08,276.58 2281.5,312.99 ; C27.2 2264.76,324.71 2276.48,312.99 K1.2
HV-: C47.1 K2.2 L11.2 | length 278.9
  Top Layer w20: C47.1 2306.1,419.29 2328.74,441.93 2373.03,441.93 K2.2
  Bottom Layer w20: K2.2 2375.98,455.45 2403.54,483.01 L11.2
HV_EN: IC1.19 R1.1 R10.1 | length 968.9
  Top Layer w12: v1@584.65,445.87 v1(585.63,445.87) 620.08,445.87 639.76,426.18 IC1.19 ; v1(1021.65,700.79) 1022.15,701.28 1072.33,701.28 R1.1 1128.05,757 1128.05,760.92 R10.1
  L3 w12: v1(585.63,445.87) 804.13,445.87 866.14,383.86 918.31,383.86 978.35,443.9 978.35,658.46 v1@1019.68,699.8
isen: Q2.1 Q2.2 Q2.3 R15.2 R20.2 | length 498.8
  Top Layer w12: 1385.73,434.16 1387.8,432.09 Q2.3 ; 1385.73,454.33 1389.07,457.68 Q2.2 ; 1385.83,485.24 1387.8,483.27 Q2.1
  Top Layer w20: 1385.73,434.16 1385.73,454.33 1385.73,474.51 1385.83,474.51 1385.83,485.24 1385.83,499.02 1459.8,572.99 1486.38,572.99 R20.2
  Top Layer w25: R15.2 1450.79,701.77 1502.95,649.61 1502.95,591.54 R20.2
NetC18_2: C18.2 F2.1 U1.2 | length 1165.6
  Top Layer w20: v1(331.69,711.61) F2.1 ; 534.45,162.4 538.39,158.46 C18.2 680.12,112.2 v1(696.85,112.2)
  L3 w20: v1(331.69,711.61) 331.69,540.35 356.3,515.75 356.3,194.88 438.98,112.2 v1(696.85,112.2)
NetC20_1: C20.1 R10.2 R11.2 U2.7 | length 308.3
  Top Layer w12: R10.2 R11.2 1238.19,701.77 ; C20.1 1238.19,701.77 ; U2.7 1243.11,570.87 1233.27,580.71 1233.27,696.85 1238.19,701.77
NetC21_1: C21.1 C34.1 L4.2 Q2.5 Q2.6 Q2.7 Q2.8 Q2.9 | length 733.5
  Top Layer w25: L4.2 1374.02,231.99 1408.76,266.73 1480.32,266.73 1506,292.42 v2(1506,444.88) ; v2(1470.37,444.88) 1488.19,462.7 v2(1488.19,483.27) ; Q2.9 v2(1506,444.88) ; Q2.9@1537.7,448.82 1509.94,448.82 v2(1506,444.88) ; v2(1541.63,444.88) 1541.63,483.95 1610.93,483.95 C21.1 1613.19,488.19 1613.19,660.43 C34.1
  other v2: 1488.19,406.5 1523.82,406.5 1523.82,483.27
NetC21_2: C21.2 D1.2 L6.2 | length 489.1
  Top Layer w25: C21.2 1721.46,418.31 1725.39,414.37 1868.11,414.37 1869.09,415.35 1981.3,415.35 2000,434.06 D1.2
NetC25_2: C25.2 R13.1 U2.8 | length 492.8
  Top Layer w12: R13.1 1149.61,449.8 1173.64,425.77 1195.21,425.77 v1@1196.85,424.13 ; U2.8 1345.47,596.46 C25.2 1350.39,625.98 v1(1358.27,633.86)
  L3 w12: v1(1197.83,425.2) 1358.27,585.63 v1(1358.27,633.86)
NetC26_2: C26.2 Q1.1 R12.2 | length 152.3
  Top Layer w25: C26.2 2126.48,56.6 2126.48,123.52 R12.2 2130.22,127.26 2130.22,149.9 2137.8,157.48 2137.8,202.46 2138.09,202.76 Q1.1
NetC28_2: C28.2 C29.2 C30.2 C31.2 D1.1 L5.1 R14.2 | length 976.6
  Top Layer w25: v1(2027.56,400.59) 2083.66,456.69 2083.66,498.03 2103.35,517.72 2147.64,517.72 D1.1 D1.1@2130.61,554.43
  Bottom Layer w25: C28.2 C29.2 ; C29.2@1729.33,386.85 C30.2@1855.73,386.85 ; C30.2 1854.71,387.87 C30.2@1855.73,386.85 ; R14.2 1862.21,380.37 C30.2@1855.73,386.85 ; R14.2@1865.45,190.94 R14.2@1865.45,194.19 ; C31.2@1956.69,386.85 C30.2@1855.73,386.85 ; C31.2 C31.2@1969.19,387.87 ; L5.1 1981.65,375.41 C31.2@1969.19,387.87 ; v1(2027.56,400.59) 2014.84,387.87 C31.2@1969.19,387.87
NetC34_2: C34.2 D2.2 L9.2 | length 365.8
  Top Layer w25: C34.2 1657.6,730.31 1672.24,715.67 1672.24,684.06 1705.71,650.59 ; L9.2 1907.48,636.81 1943.9,673.23 1988.19,673.23 D2.2
NetC36_1: C36.1 R15.1 U2.1 | length 617.4
  Top Layer w12: v1(1043.31,596.46) U2.1 ; C36.1 1348.33,692.03 1348.33,685.14 v1(1382.87,650.59)
  Top Layer w25: C36.1 1341.83,705.02 1341.83,707.96 R15.1
  L2 w12: v1(1043.31,596.46) 1043.41,596.56 1057.19,596.56 1156.5,695.87 1337.6,695.87 v1(1382.87,650.59)
NetC37_1: C37.1 C38.1 U2.2 | length 337.6
  Top Layer w12: U2.2 1141.73,570.87 1199.8,628.94 v1(1199.8,659.45)
  Bottom Layer w12: C37.1 1178.67,547.75 1197.83,566.92 1197.83,652.42 1190.81,659.45 C38.1
NetC37_2: C37.2 R18.2 | length 94.8
  Bottom Layer w12: C37.2 1146.74,584.73 1149.7,584.73 R18.2
NetC40_1: C40.1 Q3.1 R19.2 | length 153.5
  Bottom Layer w25: C40.1@2469.98,878.45 C40.1 2470.47,734.54 2470.77,734.24 Q3.1 ; R19.2@2470.97,813.48 R19.2 R19.2@2473.72,809.74
NetC41_1: C41.1 C42.1 C43.1 C44.1 L9.1 L10.1 R17.1 | length 696.5
  Top Layer w25: 1815.94,821.85 v1@1955.71,821.85
  Bottom Layer w25: C44.1@1618.11,721.42 1931.1,721.42 C41.1@1929.13,723.39 ; C41.1@1955.71,720.39 v1(1955.71,822.83) 1968.5,822.83 ; R17.1@1970.47,899.61 R17.1 1969.49,823.82 1968.5,822.83 ; L10.1 2010.79,818.86 2006.81,822.83 1968.5,822.83
NetC45_1: C45.1 C46.1 L10.2 Q3.3 R19.1 | length 516.3
  Bottom Layer w25: L10.2@2096.24,819.39 L10.2 2093.78,728.88 2101.28,721.38 C45.1 2105.85,721.91 2217.97,721.91 C46.1 C46.1@2222.44,722.44 ; C46.1@2219.98,724.9 C46.1@2222.44,722.44 ; Q3.3 2382.87,725.39 ; R19.1@2400.59,812.01 2382.87,794.29 2382.87,725.39 ; C46.1@2222.44,722.44 2379.92,722.44 2382.87,725.39
NetC48_1: C48.1 R21.2 R22.2 R23.2 U2.3 | length 1101.6
  Top Layer w12: U2.3 1133.86,545.28 1209.2,469.93 1209.2,469.78 1219.27,459.71 1219.27,436.25 v1@1231.3,424.21
  L3 w12: v1(1232.28,425.2) 1353.35,425.2 1486.22,292.32 1593.5,292.32 v1(1732.28,153.54)
  Bottom Layer w12: R23.2 1159.94,333.17 1159.94,464.05 R22.2 ; C48.1 1206.56,398.63 1232.28,424.35 v1(1232.28,425.2) ; v1(1732.28,153.54) 1762.79,123.03 R21.2
NetD3_1: D3.1 R16.1 U2.6 | length 239.2
  Top Layer w12: U2.6 1278.64,543.4 1248.13,543.4 1240.16,535.43 1240.16,460.63 1250.98,449.81 R16.1 1281.5,399.65 1288.53,392.62 1294.39,392.62 D3.1
NetD3_2: D3.2 Q2.4 R16.2 | length 134.4
  Top Layer w12: D3.2 1344.58,386.81 1350.4,392.62 1350.4,408.46 ; R16.2 1350.4,408.46 ; Q2.4 1352.36,406.5 1350.4,408.46
NetL3_1: L3.1 Q1.2 | length 103.1
  Top Layer w25: Q1.2 2144.68,277.56 2207.38,214.85 2207.38,210.93 L3.1
NetL11_1: L11.1 Q3.2 | length 69.4
  Bottom Layer w25: L11.1 2472.93,591.05 2472.93,659.14 2473.23,659.44 Q3.2
NetP1_7: P1.7 R1.2 | length 729.5
  Top Layer w12: P1.7 631.5,993.7 682.09,1044.29 1050.2,1044.29 1079.72,1014.76 1079.72,777.57 R1.2
NetP1_8: P1.8 R2.1 | length 1005
  Top Layer w12: v1(912.4,449.8) 948.36,449.8 1008.17,390 1008.17,296.55 1002.94,291.33 R2.1
  L3 w12: P1.8 631.5,1088.98 683.07,1037.4 683.07,940.94 912.4,711.61 v1(912.4,449.8)
NetP1_10: P1.10 R3.1 | length 865.4
  Top Layer w12: v1(913.39,417.32) 918.31,417.32 R3.1
  L3 w12: P1.10 731.5,1091.34 777.56,1045.28 777.56,917.32 941.93,752.95 941.93,445.87 v1(913.39,417.32)
NetP1_26: P1.26 R4.1 | length 215.1
  Bottom Layer w12: P1.26 1581.69,1042.32 1581.69,899.61 R4.1
NetP1_29: P1.29 R5.2 | length 996.2
  Top Layer w12: R5.2 v1@1042.32,628.94
  L2 w12: v1(1042.32,627.95) 1137.8,723.43 1656.5,723.43 1731.5,798.43 P1.29
NetP1_37: P1.37 R6.2 | length 1422
  Top Layer w20: R6.2 1035.88,499 v1(1037.63,500.75)
  L2 w12: v1(1037.63,500.75) 1039.37,499.02 1371.06,499.02 1409.45,537.4 1820.87,537.4 2131.5,848.03 P1.37
NetP1_40: P1.40 R7.1 | length 1508.6
  Top Layer w20: R7.1 v1(1040.06,563.98)
  L2 w12: v1(1040.06,563.98) 1727.89,563.98 2076.77,912.86 2076.77,1013.78 2104.33,1041.34 2175.2,1041.34 2226.38,1092.52 P1.40
NetR23_1: R23.1 U3.8 | length 268
  Top Layer w12: U3.8 880.32,218.5 897.64,235.82 v1@897.64,237.2
  L3 w12: v1(898.62,236.22) 958.17,236.22 v1(1054.63,332.67)
  Bottom Layer w12: v1@1054.63,331.69 1055.61,332.67 R23.1
PHY: C13.2 C14.2 IC1.3 L1.2 | length 406
  Top Layer w12: IC1.3 511.88,620.01 525.01,606.88 v1(526.57,606.88)
  Bottom Layer w17: L1.2 316.3,421.62 321.23,421.62 C13.2 378.44,479.82 378.44,543.81 C14.2 464.58,544.3 526.57,606.3 v1(526.57,606.88)
PLL: C15.2 C16.2 IC1.8 L2.2 | length 340
  Top Layer w12: IC1.8 530.44,521.58 v1@530.51,521.65
  Bottom Layer w12: v1(532.48,520.67) 578.24,520.67 580.71,523.13
  Bottom Layer w17: C16.2 580.71,523.13 C15.2 651.58,418.31 L2.2
REF: IC1.5 R9.1 | length 107.3
  Top Layer w12: v1(413.39,603.35) 413.39,587.76 420.42,580.73 462.98,580.73 IC1.5
  Bottom Layer w12: R9.1 378.93,611.22 403.96,611.22 411.84,603.35 v1(413.39,603.35)
RES: C19.2 IC1.34 R8.2 | length 201
  Top Layer w12: IC1.34 848.29,620.01 855.32,627.04 v1(855.32,662.4) v1@855.32,664.37
  Bottom Layer w12: v1(855.32,662.4) 856.86,662.4 860.9,658.36 877.06,658.36 C19.2 R8.2
SCK: IC1.13 P1.23 U3.3 | length 1880.5
  Top Layer w12: v1(481.3,310.04) 481.3,320.96 521.65,361.32 IC1.13 ; v1@692.91,178.15 693.9,179.13 U3.3
  L3 w12: v1(481.3,310.04) 482.39,308.95 499.13,308.95 ; v1(693.9,177.17) 630.91,177.17 499.13,308.95 ; P1.23 1381.69,1042.32 1303.15,1042.32 1286.42,1025.59 1286.42,684.06 938.98,336.61 526.57,336.61 499.13,309.16 499.13,308.95
TOP1: IC1.32 R7.2 | length 142.2
  Top Layer w12: IC1.32 852.44,580.64 869.09,563.98 R7.2
TOP2: IC1.31 R6.1 | length 169.8
  Top Layer w12: IC1.31 843.58,560.95 876.97,527.56 876.97,510.83 885.83,501.97 928.13,501.97 R6.1
TRIG: IC1.20 R2.2 | length 319.3
  Top Layer w12: IC1.20 659.45,331.69 681.1,310.04 850.39,310.04 865.16,295.28 905.5,295.28 R2.2
usbm: IC1.6 J1.2 | length 275.3
  Top Layer w12: J1.2 313.98,517.72 357.21,560.95 IC1.6
usbp: IC1.7 J1.3 | length 277.7
  Top Layer w12: J1.3 330.71,492.13 379.85,541.27 IC1.7
USER: IC1.21 R3.2 | length 288.9
  Top Layer w12: IC1.21 679.13,340.55 687.99,331.69 848.43,331.69 873.03,356.3 R3.2
XI: C7.2 IC1.1 Y1.1 | length 459.7
  Top Layer w12: v1(375.98,724.41) 429.13,724.41 463.07,690.47 IC1.1
  Bottom Layer w12: C7.2 270.67,888.78 Y1.1 272.64,886.81 315.94,886.81 345.42,857.34 345.42,754.98 v1(375.98,724.41)
XO: C4.2 IC1.2 Y1.3 | length 305.3
  Top Layer w12: v1@407.48,689.96 407.48,655.51 423.21,639.79 462.98,639.79 IC1.2
  Bottom Layer w12: v1(407.48,691.93) 407.48,728.35 437.01,757.87 Y1.3 497.75,797.24 502.06,801.56 502.06,812.1 C4.2
pads on no net: IC1.25 IC1.26 IC1.27 IC1.28 IC1.29 IC1.30 IC1.43 IC1.44 IC1.45 J1.4 J1.MH5 J1.MH6 K1.1 K2.1 P1.3 P1.5 P1.11 P1.12 P1.13 P1.14 P1.15 P1.16 P1.17 P1.18 P1.22 P1.27 P1.28 P1.31 P1.32 P1.33 P1.35 P1.36 P1.38 Q2.9A Q2.9B Q2.9C Q2.9D Y1.2 Y1.4

## Polygon pours and split planes (outlines as drawn)
GND on L2 "GND_L02_P000" (solid, pour order 0): 0,1184.06 2.95,1181.1 2562.01,1181.1 2562.01,2.95 2559.06,0 0,0
HGND on Bottom Layer "HGND" (solid, pour order 1): 1652.56,941.93 2550.2,941.93 2553.15,6.89 1070.97,16.75 1070.97,353.35 1070.97,936.02

## Keep-outs
Keep-Out Layer:
  the board outline again, w15.75

## Silkscreen, mask and mechanical layers (free items; w line width, h text height)
Top Overlay:
  drawing of 906 lines, arcs and shapes, not listed
  text "Layer" at 80.12,4722.15 h60
  text "Layer" at 89.96,4722.15 h60
  text "Name" at 490.03,4722.15 h60
  text "Name" at 499.87,4722.15 h60
  text "Material" at 1419.77,4722.15 h60
  text "Material" at 1429.62,4722.15 h60
  text "Thickness" at 2279.54,4722.15 h60
  text "Thickness" at 2289.38,4722.15 h60
  text "Constant" at 2929.38,4722.15 h60
  text "Constant" at 2939.22,4722.15 h60
  text "Board Layer Stack" at 3499.24,4722.15 h60
  text "Board Layer Stack" at 3509.08,4722.15 h60
  text "Top Overlay" at 490.03,4602.15 h60
  text "Top Overlay" at 499.87,4602.15 h60
  text "Top Solder" at 490.03,4482.15 h60
  text "Top Solder" at 499.87,4482.15 h60
  text "Solder Resist" at 1419.77,4482.15 h60
  text "Solder Resist" at 1429.62,4482.15 h60
  text "0,40mil" at 2279.54,4482.15 h60
  text "0,40mil" at 2289.38,4482.15 h60
  text "3,5" at 2929.38,4482.15 h60
  text "3,5" at 2939.22,4482.15 h60
  text "1" at 80.12,4362.15 h60
  text "1" at 89.96,4362.15 h60
  text "Top Layer" at 490.03,4362.15 h60
  text "Top Layer" at 499.87,4362.15 h60
  text "Copper" at 1419.77,4362.15 h60
  text "Copper" at 1429.62,4362.15 h60
  text "1,40mil" at 2279.54,4362.15 h60
  text "1,40mil" at 2289.38,4362.15 h60
  text "Dielectric 2" at 490.03,4242.15 h60
  text "Dielectric 2" at 499.87,4242.15 h60
  text "PP-018" at 1419.77,4242.15 h60
  text "PP-018" at 1429.62,4242.15 h60
  text "6,00mil" at 2279.54,4242.15 h60